# Altium PCB Simplified.PcbDoc
Units mil, origin at the board's own origin, x right, y up, seen from the top; angles counter-clockwise.
Board outline 5026.91 x 4685 mil, 2 copper layers (Top Layer, Bottom Layer); 24 components, 26 nets, 125 pads, 49 vias.
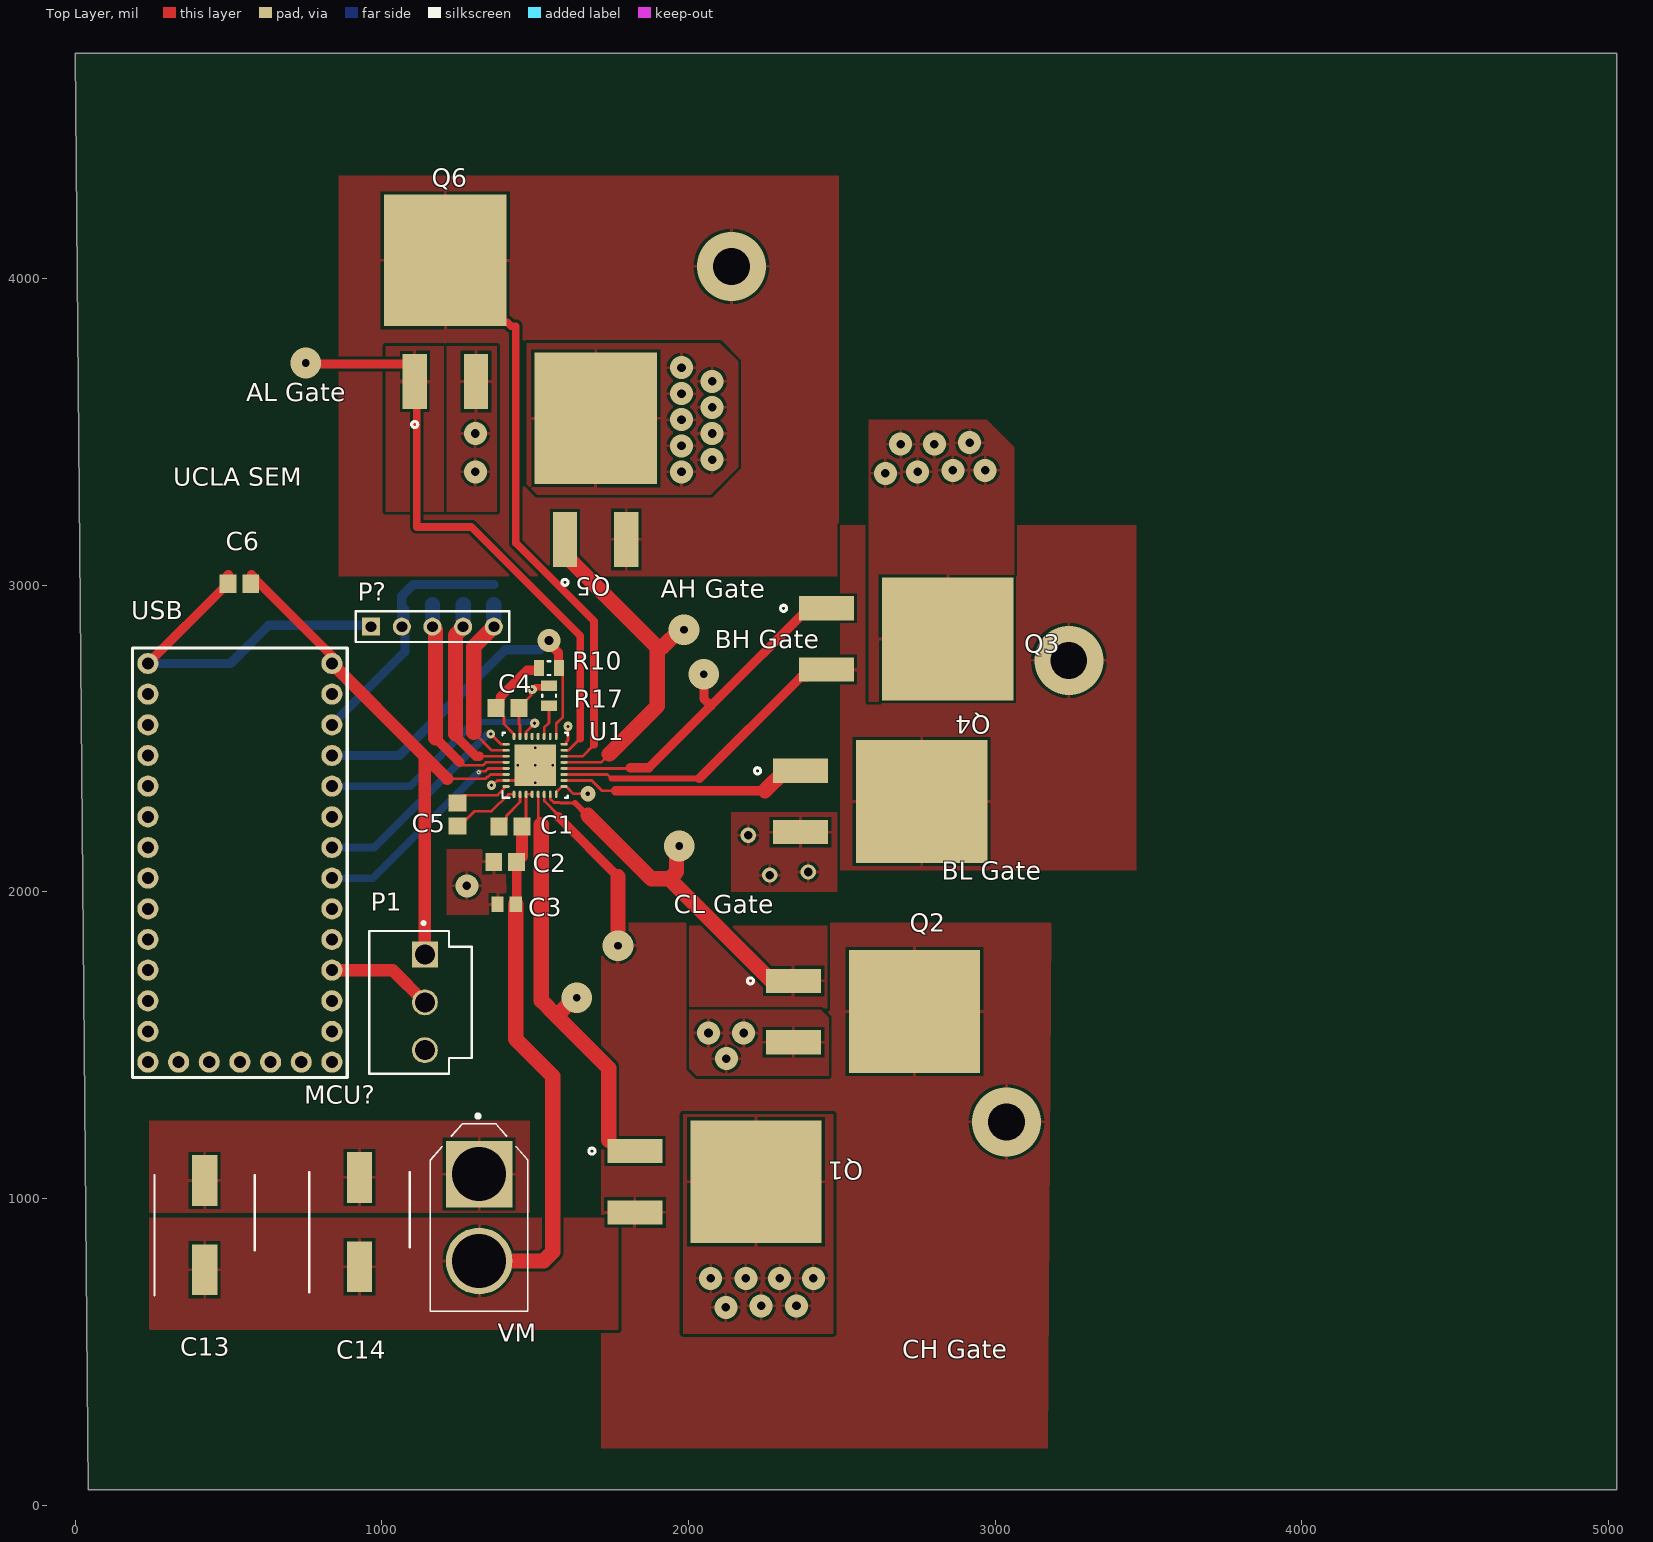
[diagram p0: Top Layer view]
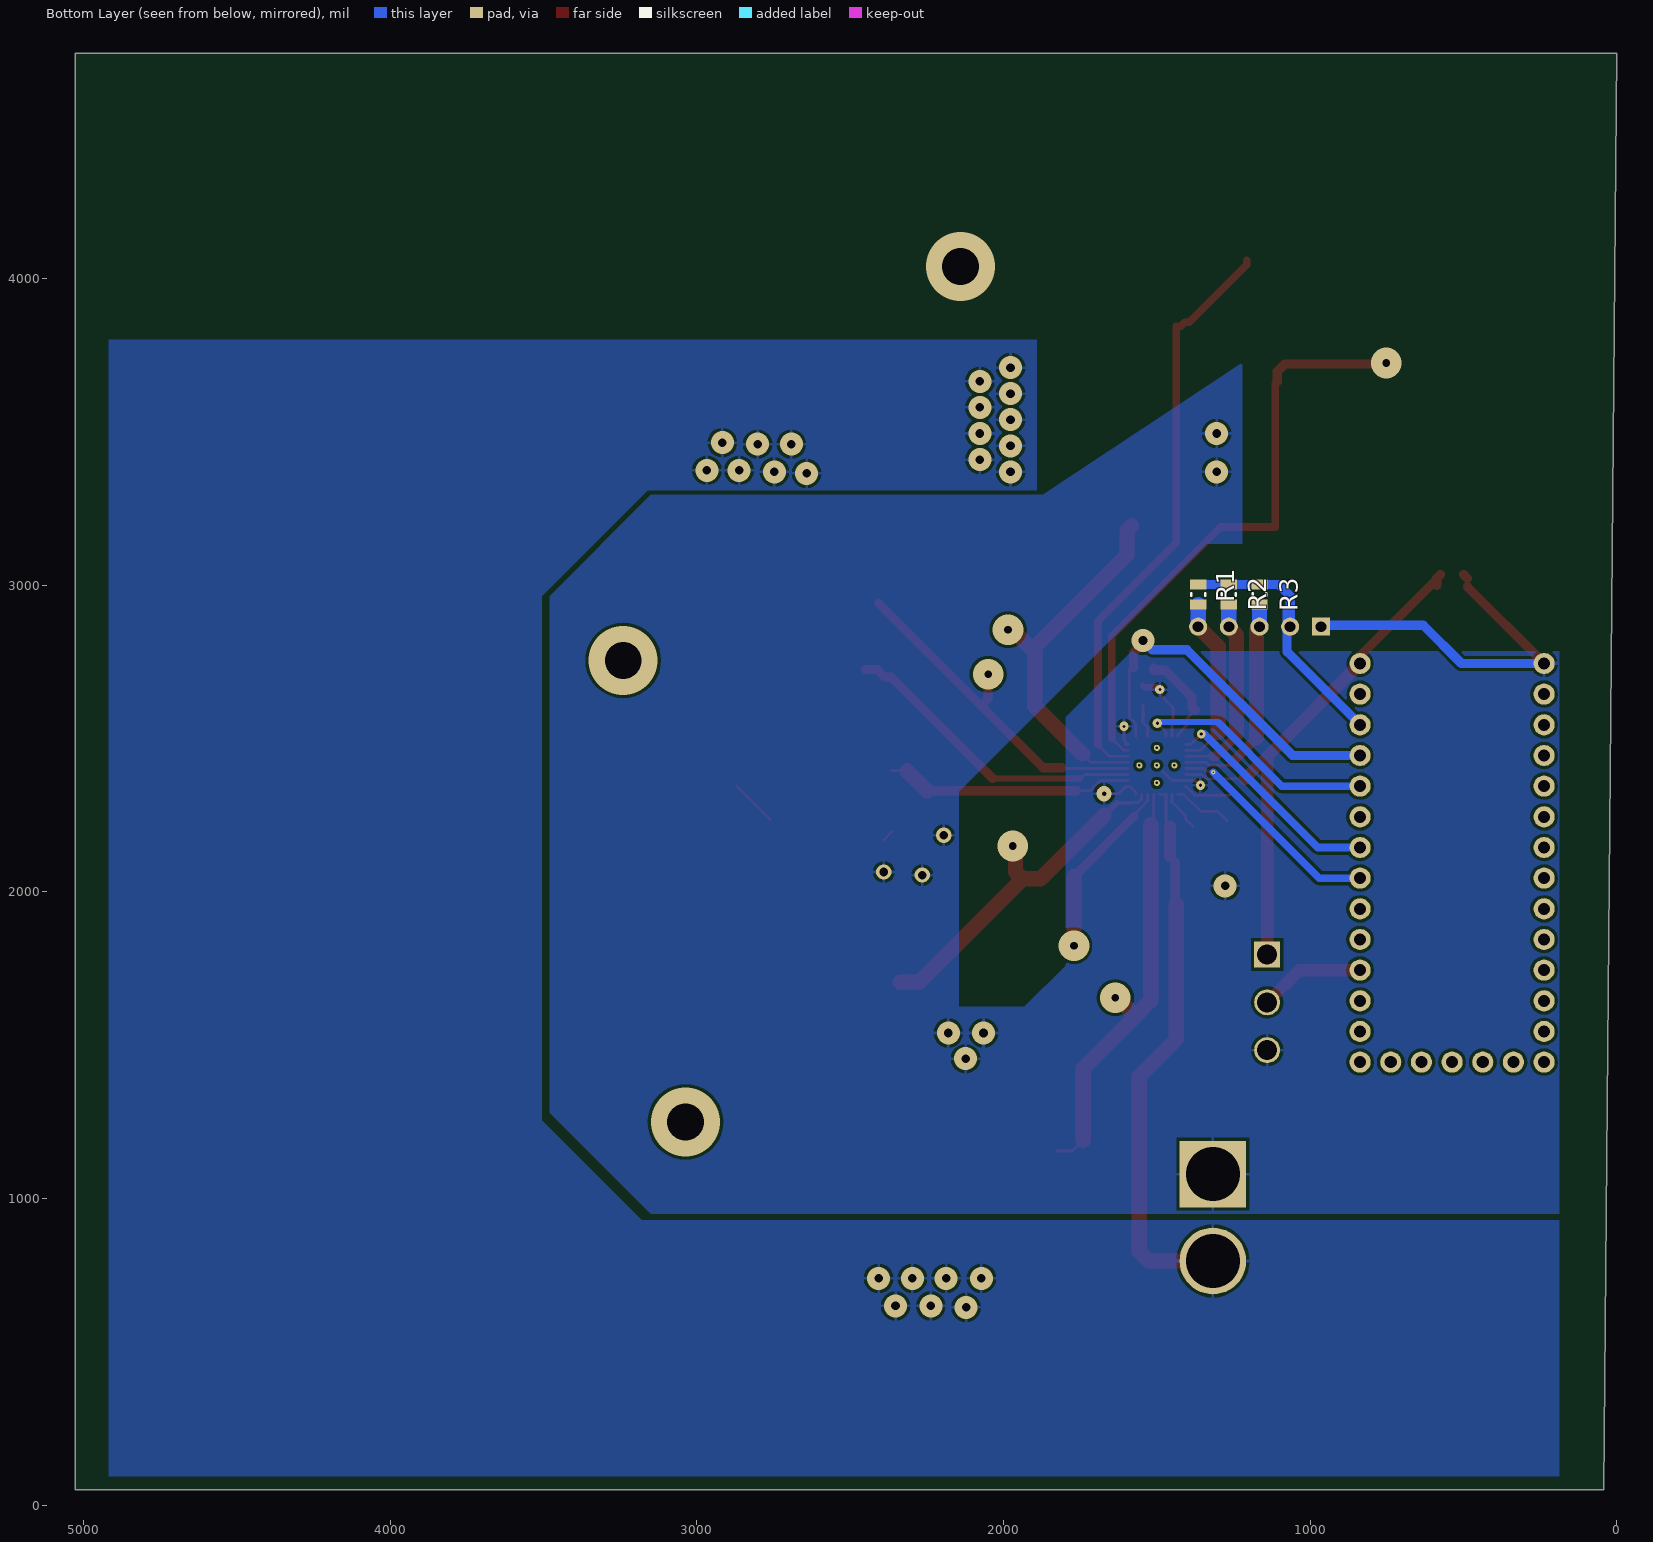
[diagram p1: Bottom Layer view, seen from below]

## Layer stack, top to bottom
Top Solder: solder mask 0.4, Solder Resist, Dk 3.5
Top Layer: signal copper 1.4
Dielectric 1: dielectric 12.6, FR-4, Dk 4.8
Bottom Layer: signal copper 1.4
Bottom Solder: solder mask 0.4, Solder Resist, Dk 3.5

## Board outline
0,4735 5026.91,4735 5026.91,1035 5026.91,50 41.91,50

## Design rules (kind name [scope] priority, off if disabled: settings)
Clearance [All] p1: gap=10 ignorepadtopadclearanceinfootprint=TRUE except(0: Arc-Hole Track-Hole SMDPad-Hole THPad-Hole Via-Hole Fill-Hole Poly-Hole Region-Hole Text-Hole)
PolygonConnect [All] p1: connectstyle=Relief reliefconductorwidth=10 reliefentries=4 polygonreliefangle="90 Angle" airgapwidth=10
RoutingVias [All] p1: holewidth=28 width=50 viastyle="Through Hole" minholewidth=28 minwidth=50 maxholewidth=28 maxwidth=50
SolderMaskExpansion [All] p1: expansion=4 istentingtop=FALSE
Width [All] p1: maxlimit=10000 minlimit=5 preferedwidth=30 bottomlayer_minwidth=10 minimp=50.000000 maximp=50.000000 favimp=50.000000
30 further rules are at their usual default settings.

## Components (designator, comment, footprint, x,y, rotation, side; value= is the part's Value field where it differs from the comment)
C1 "1uF" CAPC2013X135X45ML10T25 1419.7,2212.79 r0 top
C2 "0.1uF" CAPC2013X135X45ML10T25 1402.1,2097.79 r0 top
C3 "10uF" CAPC2013X135X50LL10T20 1406.91,1960 r0 top
C4 "1uF" CAPC2013X135X45ML10T25 1410,2600 r180 top
C5 "47nF" CAPC2013X135X45ML10T25 1246.91,2252.6 r270 top
C6 "0.1uF" CAPC2013X135X45ML10T25 535,3005 r180 top
C13 "EEE-TC1V101P" CAPAE830X1050N 421.91,913.27 r90 top
C14 "EEE-TC1V101P" CAPAE830X1050N 926.91,923.27 r90 top
MCU? "teensy3.2" teensy3.2 836.91,2745 r270 top
P1 "B3P-VH(LF)(SN)" JST-B3P-VH(LF)(SN)-3_V 1090.79,1640 r270 top
P? "Header 5" HDR1X5 965,2865 r0 top
Q1 "INFINEON" MOSFET-2 2040,1055 r180 top
Q2 "INFINEON" MOSFET-2 2556.91,1610 r180 top
Q3 "INFINEON" MOSFET-2 2665,2825 r180 top
Q4 "INFINEON" MOSFET-2 2580,2295 r180 top
Q5 "INFINEON" MOSFET-2 1696.91,3364.48 r270 top
Q6 "INFINEON" MOSFET-2 1206.91,3879.48 r270 top
R1 "CRCW08050000Z0EA" RESC2013X50X30LL20T20 1365,2970 r270 bottom
R2 "CRCW08050000Z0EA" RESC2013X50X30LL20T20 1265,2970 r270 bottom
R3 "CRCW08050000Z0EA" RESC2013X50X30LL20T20 1165,2970 r270 bottom
R10 "CRCW08050000Z0EA" RESC2013X50X30LL20T20 1545,2730 r180 top
R17 "CRCW08050000Z0EA" RESC2013X50X30LL20T20 1545,2640 r90 top
U1 "DRV8320HRTVR" RTV0032E 1499.7,2412.79 r90 top value=Value
VM "Battery" *AMASS_XT60-M 1316.91,938.27 r270 top

## Footprints (in the part's own frame and the unit in brackets; to place one, negate y for a bottom-side part, rotate by r counter-clockwise, add the part's x,y. Pads: shape width x height; smd on the part's side, far side on the other; paste and mask are expansions set on the pad)
*AMASS_XT60-M [mm]
  round 5.516 hole 4.5: 1(3.6,0)
  rect 5.516x5.516 hole 4.5: 2(-3.6,0)
  silkscreen extent -8.55,-4.05 7.75,4.05
CAPAE830X1050N [mm]
  rect 4.2x2.1 smd: 1(-3.7,0) 2(3.7,0)
  silkscreen extent -5.8,-4.15 4.15,4.15, body extent -5,-4.25 5,4.25, height 10.5
CAPC2013X135X45ML10T25 [mm] "Chip Capacitor, 2-Leads, Body 2.10x1.35mm, IPC Low Density"
  rect 1.4x1.5 smd: 1(-0.95,0) 2(0.95,0)
  body extent -1.05,-0.67 1.05,0.67, height 1.35
CAPC2013X135X50LL10T20 [mm] "Chip Capacitor, 2-Leads, Body 2.00x1.25mm, IPC High Density"
  rect 1x1.3 smd: 1(-0.75,0) 2(0.75,0)
  body extent -1.05,-0.67 1.05,0.68, height 1.35
HDR1X5 [mm] "Connector; Header; 5 Position"
  rect 1.5x1.5 hole 0.9: 1(0,0)
  round 1.5 hole 0.9: 2(2.54,0) 3(5.08,0) 4(7.62,0) 5(10.16,0)
  silkscreen extent -1.27,-1.27 11.43,1.27
JST-B3P-VH(LF)(SN)-3_V [mm] "Connector, 3-Leads, Body 8.5x11.82mm, Pitch 3.96mm"
  rect 2.15x2.15 hole 1.65: 1(-3.96,1.25)
  round 2.15 hole 1.65: 2(0,1.25) 3(3.96,1.25)
  silkscreen extent -6.68,-3.35 5.91,5.15, body extent -5.91,-3.35 5.91,5.15, height 10.9
MOSFET-2 [mil]
  rect 180x78.74 smd: 1(215,-100) 3(215,100)
  rect 428.35x400 smd: 2(-180,0)
  silkscreen extent 345,-110 365,-90
RESC2013X50X30LL20T20 [mm] "Chip Resistor, 2-Leads, Body 2.00x1.25mm, IPC High Density"
  rect 0.85x1.35 smd: 1(-0.825,0) 2(0.825,0)
  silkscreen extent -0.1,-0.58 0.1,0.58, body extent -1.1,-0.72 1.1,0.72, height 0.5
RTV0032E [mm]
  oval 0.6x0.24 smd paste+0 mask+0.051: 1(-2.4,1.75) 2(-2.4,1.25) 3(-2.4,0.75) 4(-2.4,0.25) 5(-2.4,-0.25) 6(-2.4,-0.75) 7(-2.4,-1.25) 8(-2.4,-1.75) 17(2.4,-1.75) 18(2.4,-1.25) 19(2.4,-0.75) 20(2.4,-0.25) 21(2.4,0.25) 22(2.4,0.75) 23(2.4,1.25) 24(2.4,1.75)
  oval 0.24x0.6 smd paste+0 mask+0.051: 9(-1.75,-2.4) 10(-1.25,-2.4) 11(-0.75,-2.4) 12(-0.25,-2.4) 13(0.25,-2.4) 14(0.75,-2.4) 15(1.25,-2.4) 16(1.75,-2.4) 25(1.75,2.4) 26(1.25,2.4) 27(0.75,2.4) 28(0.25,2.4) 29(-0.25,2.4) 30(-0.75,2.4) 31(-1.25,2.4) 32(-1.75,2.4)
  rect 3.45x3.45 smd paste-1.712 mask+0.051: 33(0,0)
  round 0.5 hole 0.203 mask+0.051: ""(-1.45,0) ""(0,1.45) ""(0,0) ""(0,-1.45) ""(1.45,0)
  silkscreen extent -2.7,-2.7 2.7,2.7, body extent 0,0 0.25,0.25, height 0.25
teensy3.2 [mm]
  round 1.75 hole 1: 1(0,0) 2(2.54,0) 3(5.08,0) 4(7.62,0) 5(10.16,0) 6(12.7,0) 7(15.24,0) 8(17.78,0) 9(20.32,0) 10(22.86,0) 11(25.4,0) 12(27.94,0) 13(30.48,0) 14(33.02,0) 15(33.02,-2.54) 16(33.02,-5.08) 17(33.02,-7.62) 18(33.02,-10.16) 19(33.02,-12.7) 20(33.02,-15.24) 21(30.48,-15.24) 22(27.94,-15.24) 23(25.4,-15.24) 24(22.86,-15.24) 25(20.32,-15.24) 26(17.78,-15.24) 27(15.24,-15.24) 28(12.7,-15.24) 29(10.16,-15.24) 30(7.62,-15.24) 31(5.08,-15.24) 32(2.54,-15.24) 33(0,-15.24)
  silkscreen extent -1.27,-16.51 34.29,1.27

## Part data
C1 C4 C5: library part CMP-2000-04946-1, "Multilayer Ceramic Capacitor, 1 uF, +/- 10%, 16 V, -55 to 125 degC, 0805 (2012 Metric), RoHS, Tape and Reel", Capacitance=1µF, Case Size/Dimension=0805, Dielectric=X7R, Manufacturer=Murata, Package Description="2-Pin Surface Mount Device, Body 2 x 1.25 mm", Package Reference=805, Rated Voltage=16V, Tolerance (%)=±10%, Datasheet URL=https://datasheet.ciiva.com/34302/1858922-34302874.pdf, Datasheet Version=Mar-08, Manufacturer URL=http://www.murata.com/
C2 C6: library part CMP-2100-03644-1, "Chip Capacitor, 0.1 uF, +/- 10%, 50 V, -55 to 125 degC, 0805 (2012 Metric), RoHS, Tape and Reel", Capacitance=100nF, Case Code (Imperial)=0805, Case Code (Metric)=2012, Dielectric=X7R, Dielectric Material=Ceramic, Insulation Resistance=10GR, Manufacturer=Murata, Max Operating Temperature=125degC, Min Operating Temperature=-55degC, Package Description="2-Pin Surface Mount Device, Body 2 x 1.25 mm", Package Quantity=1, Tolerance=10%, Voltage=50V, Case/Package=0805, Datasheet URL=http://psearch.en.murata.com/capacitor/product/GRM21BR71H104KA01%23.pdf, Datasheet Version=42675.0, Depth=1.25mm, Height=1.25mm, Lead Free=LeadFree, Length=2mm, Manufacturer URL=http://www.murata.com/, Material=Ceramic, Mount=SurfaceMount, Number of Pins=2, Package Reference=0805, Packaging=TapeandReel, Radiation Hardening=No, REACH SVHC=Unknown, RoHSCompliant=true, Termination=SMD/SMT, Thickness=0.053inch, Voltage Rating=50V, Voltage Rating (DC)=50V, Width=0.049inch
C3: library part CMP-2007-03453-1, Manufacturer=Murata, Part Number=GRM21BR61C106KE15L
C13 C14: "Capacitor", Manufacturer_Name=Panasonic, Mouser Part Number=667-EEE-TC1V101P, Arrow Part Number=EEE-TC1V101P, Arrow Price/Stock=https://www.arrow.com/en/products/eee-tc1v101p/panasonic, Datasheet Link=https://www.mouser.in/datasheet/2/315/ABA0000C678-951953.pdf, Height=10.5mm, Manufacturer_Part_Number=EEE-TC1V101P, Mouser Price/Stock=https://www.mouser.com/Search/Refine.aspx?Keyword=667-EEE-TC1V101P
P1: library part CMP-1755-00003-1, "Male Header, Pitch 3.96 mm, 1 x 3 Position, Height 10.9 mm, Tail Length 3.7 mm, -25 to 85 degC, RoHS, Bulk", ComponentLink1Description="Manufacturer URL", ComponentLink1URL=http://www.jst.com/home2.html, ComponentLink2Description=Datasheet, ComponentLink2URL=http://www.jst-mfg.com/product/pdf/eng/eVH.pdf, DatasheetVersion=May-16, PackageDescription="Male Header, Pitch 3.96 mm, 1 x 3 Position, Height 10.9 mm, Tail Length 3.7 mm", PackageReference=B3P-VH(LF)(SN)
P?: "Header, 5-Pin", LatestRevisionDate=17-Jul-2002, LatestRevisionNote="Re-released for DXP Platform.", Publisher="Altium Limited"
R1 R2 R3 R10 R17: library part CMP-2001-04896-1, Manufacturer="Vishay Dale", Part Number=CRCW08050000Z0EA
U1: "No Description Available", Manufacturer="Texas Instruments", Copyright="Copyright (C) 2018 Accelerated Designs. All rights reserved", PartNumber=DRV8320HRTVR, RefDes=RefDes, Type=DEV

## Via types
v1: diameter 75, hole 28, Top Layer to Bottom Layer, 30 vias
v2: diameter 100, hole 25, Top Layer to Bottom Layer, 6 vias
v3: diameter 30, hole 10, Top Layer to Bottom Layer, 4 vias
v4: diameter 50, hole 28, Top Layer to Bottom Layer, 3 vias
v5: diameter 225, hole 120, Top Layer to Bottom Layer, 3 vias
v6: diameter 28, hole 10, Top Layer to Bottom Layer, 1 vias
v7: diameter 15, hole 5, Top Layer to Bottom Layer, 1 vias
v8: diameter 50, hole 15, Top Layer to Bottom Layer, 1 vias

## Nets (pads, with @x,y where several pads share a name; then routed paths per layer and width w, separated by ;. In a path a pad name is that pad's centre, name@x,y a point inside that pad or via, vN(x,y) a via of type N, cw(c..) or ccw(c..) an arc to the next point about the centre after c; other vN are vias at no path point)
+3.3: MCU?.3 P?.2 R1.1 R2.1 R3.1 | length 889.1
  Bottom Layer w30: MCU?.3 1075,2783.09 1075,2920 ; P?.2 1065,2965 1102.48,3002.48 R3.1 R2.1 R1.1
+5: C6.1 MCU?.1 P1.1 U1.30 | length 1769.9
  Top Layer w9: 1213.1,2368.81 1336.98,2368.81 1342.98,2374.81 1345.64,2374.81 1354.09,2383.26 U1.30
  Top Layer w30: 574.32,3035 586.87,3022.44 C6.1@586.87,3000.04 ; C6.1@586.87,3020.04 MCU?.1@836.91,2770
  Top Layer w40: MCU?.1 1133.46,2448.46 1140,2441.91 ; P1.1 1140,2441.91 ; 1213.1,2368.81 1140,2441.91
GND: C2.1 C3.1 C4.1 C6.2 C13.2 C14.2 MCU?.33 P1.3 P?.1 Q2.3 Q4.3 Q6.3 R17.2 U1.8 U1.9 U1.16 U1.23 U1.31 U1.33 VM.2 | length 1760.5
  Top Layer w9: v3(1357.84,2347.95) 1359.89,2350 1362.6,2350 1376.17,2363.57 U1.31 1450.49,2363.57 U1.33@1482.49,2395.57 ; U1.23 1450.49,2543.18 1447.4,2546.27 C4.1 1447.4,2601.97 1485.98,2640.55 1485.98,2655.98 v3(1490,2660) ; U1.8 1568.6,2325.39 1587.1,2343.89 U1.9 1601.28,2343.89 1625.17,2320 v8(1671.91,2320) ; U1.16 1601.15,2481.68 1601.36,2481.89 1601.36,2488.86 1606.91,2494.41 v3(1606.91,2540) ; Q4.3 Q4.3@2390,2170
  Top Layer w20: v3(1490,2660) 1492.71,2660 1500.04,2667.34 1539.86,2667.34 R17.2
  Top Layer w30: MCU?.33 C6.2@486.95,2995.04 ; C6.2@486.95,3022.44 499.51,3035
  Bottom Layer w30: MCU?.33 506.22,2745 631.22,2870 960,2870 P?.1
  other v1: 2123.4,1456.05 2065,1540 2180,1540 1276.91,2020 1305,3370 1305,3495
  other v4: 2265,2055 2390,2065 2195,2185
NetC1_1: C1.1 U1.2 | length 133.8
  Top Layer w9: C1.1 1405.36,2235.85 1405.36,2247.86 1450.49,2292.99 U1.2
NetC4_2: C4.2 R10.2 U1.24 | length 324.6
  Top Layer w9: C4.2@1374.7,2592.79 1397.76,2569.73 1397.76,2547.41 1430.8,2514.36 U1.24
  Top Layer w30: C4.2@1374.7,2592.79 1385.16,2603.24 1385.16,2630 1387.26,2632.1 1387.26,2637.26 1472.79,2722.79 1510.79,2722.79 R10.2@1510.79,2730
NetC5_1: C5.1 U1.32 | length 155.3
  Top Layer w9: C5.1@1261.91,2315 1262.41,2315.5 1376.82,2315.5 U1.32
NetC5_2: C5.2 U1.1 | length 194.4
  Top Layer w9: C5.2@1271.91,2232.6 1302.76,2263.44 1357.72,2263.44 1412.58,2318.3 U1.1
NetM_1: Q1.3 Q2.2 U1.6 | length 593
  Top Layer w9: U1.6 1529.23,2311.09 1529.69,2310.63 1529.69,2296.06 1575,2250.75 1575,2245
  Top Layer w30: 1575,2245 1770,2050
  Top Layer w50: v2(1770,1825) 1770,2050
  other v5: 3036.91,1250
NetM_2: Q3.3 Q4.2 U1.11 | length 1187.7
  Top Layer w9: U1.11 1735.55,2383.26 1748.81,2370 ; Q3.3@2411.22,2715 Q3.3@2435,2715 ; Q4.2@2760,2235 Q4.2@2870,2345
  Top Layer w20: 1748.81,2370 2035,2370
  Top Layer w30: 2035,2370 2365.63,2700.63 2386.85,2700.63 2411.22,2725 2435,2725 Q3.3
  other v5: 3240,2755
NetM_3: Q5.3 Q6.2 U1.14 | length 1911.1
  Top Layer w9: U1.14 1654.23,2442.31 1691.91,2480
  Top Layer w25: Q6.2 1206.91,4045.31 1394.41,3857.81 1408.59,3857.81 1421.39,3845 1436.91,3845 1436.91,3138.09 1691.91,2883.09 1691.91,2480
  other v5: 2140,4040
NetMCU?_4: MCU?.4 R10.1 U1.17 | length 1196.7
  Top Layer w9: U1.17 1568.6,2549.36 1590,2570.76 R10.1@1590,2728.27
  Top Layer w30: v1(1545,2820) 1545,2810.67 1575.75,2779.93 1575.75,2731.73 R10.1
  Bottom Layer w30: MCU?.4 1056.91,2445 1401.91,2790 1515,2790 v1(1545,2820)
NetMCU?_5: MCU?.5 U1.22 | length 804
  Top Layer w9: U1.22 1470.26,2507.36 1470.26,2521.95 v3(1498.31,2550)
  Bottom Layer w20: 1296.91,2550 1300.91,2554 1494.31,2554 v3(1498.31,2550)
  Bottom Layer w25: MCU?.5 1091.91,2345 1296.91,2550
NetMCU?_7: MCU?.7 U1.25 | length 735.4
  Top Layer w9: v6(1355,2515) 1388.32,2481.68 U1.25
  Bottom Layer w25: MCU?.7 975,2145 1345,2515 v6(1355,2515)
NetMCU?_8: MCU?.8 U1.29 | length 716.6
  Top Layer w9: v7(1315.89,2390.81) 1317.51,2390.81 1320.51,2393.81 1337.77,2393.81 1346.9,2402.94 U1.29
  Bottom Layer w25: MCU?.8 970.07,2045 v7(1315.89,2390.81)
NetMCU?_11: MCU?.11 P1.2 | length 346.6
  Top Layer w40: MCU?.11 1035,1745 P1.2
NetP?_3: P?.3 R3.2 U1.28 | length 710.9
  Top Layer w9: 1254.74,2422.17 1264.1,2412.81 1329.9,2412.81 1339.72,2422.63 U1.28
  Top Layer w30: 1175,2501.91 1254.74,2422.17
  Top Layer w50: P?.3 1175,2855 1175,2501.91
  Bottom Layer w50: P?.3 R3.2
NetP?_4: P?.4 R2.2 U1.27 | length 631.5
  Top Layer w9: 1317.69,2442.31 U1.27
  Top Layer w30: 1240,2515 1240,2509.29 1306.97,2442.31 1317.69,2442.31
  Top Layer w50: 1240,2515 1240,2837.55 1265,2862.55 P?.4
  Bottom Layer w50: P?.4 R2.2
NetP?_5: P?.5 R1.2 U1.26 | length 573.9
  Top Layer w9: 1300,2520 1300,2519.7 1357.7,2462 U1.26
  Top Layer w50: 1300,2520 1300,2800 P?.5
  Bottom Layer w50: P?.5 R1.2
NetQ1_1: Q1.1 U1.5 | length 1413.3
  Top Layer w9: U1.5 1509.54,2311.09 1510,2310.63 1510,2230 1520,2220 ; Q1.1@1739.5,1189.87 1774.37,1155 Q1.1
  Top Layer w50: 1520,2220 1520,1645.2 1570.1,1595.1 ; v2(1635,1655) 1630,1655 1570.1,1595.1 ; Q1.1@1739.5,1189.87 1739.5,1425.7 1570.1,1595.1
NetQ2_1: Q2.1 U1.7 | length 1171.6
  Top Layer w9: U1.7 1549,2318.21 1549,2303.62 1560.64,2291.99 1580.01,2291.99 1582,2290 1630,2290 ; 1670,2250 1671.91,2250
  Top Layer w20: 1630,2290 1670,2250
  Top Layer w50: 1671.91,2250 1879.43,2042.48 1937.52,2042.48 ; v2(1970,2150) 1960.43,2140.43 1960.43,2065.39 1937.52,2042.48 ; Q2.1@2336.91,1705 2275,1705 1937.52,2042.48
NetQ3_1: Q3.1 U1.12 | length 1149.3
  Top Layer w9: U1.12 1807.94,2402.94 1810,2405
  Top Layer w30: 1810,2405 1870.63,2405 2072.82,2607.19 ; v2(2050,2710) 2050,2630 2072.82,2607.19 ; Q3.1@2407.82,2942.19 2072.82,2607.19
NetQ4_1: Q4.1 U1.10 | length 811.6
  Top Layer w9: U1.10 1684.2,2363.57 1717.78,2330 1761.94,2330 ; Q4.1@2314.37,2395 Q4.1
  Top Layer w30: 1761.94,2330 2249.37,2330
  Top Layer w50: 2249.37,2330 Q4.1@2314.37,2395
NetQ5_1: Q5.1 U1.13 | length 1209.2
  Top Layer w9: U1.13 1714.54,2422.63 1741.91,2450
  Top Layer w50: Q5.1@1582.54,3193.96 1596.91,3179.59 Q5.1 1596.91,3098.85 1898.46,2797.31 ; 1741.91,2450 1898.46,2606.54 1898.46,2797.31 ; v2(1985,2855) 1971.47,2855 1913.78,2797.31 1898.46,2797.31
NetQ6_1: Q6.1 U1.15 | length 1959.9
  Top Layer w9: U1.15 1594.27,2462.09 1608.86,2462.09 1646.91,2500.14
  Top Layer w25: Q6.1 1114.15,3657.25 1114.15,3190.29 1291.63,3190.29 1646.91,2835 1646.91,2500.14
  Top Layer w30: v2(751.91,3725) 755.12,3721.8 1082.54,3721.8 1106.91,3697.43 Q6.1
NetR17_1: R17.1 U1.19 | length 106.8
  Top Layer w9: U1.19 1529.23,2535.6 1545,2551.37 R17.1
VDD: C1.2 C2.2 C3.2 C13.1 C14.1 Q1.2 Q3.2 Q5.2 U1.3 U1.4 VM.1 | length 1818.9
  Top Layer w9: C2.2 C2.2@1457.1,2115.39 ; C1.2 1470.17,2225.86 U1.3 U1.4
  Top Layer w30: C3.2@1439.5,1967.98 C2.2
  Top Layer w40: C2.2@1457.1,2115.39 C1.2
  Top Layer w50: VM.1 1527.62,796.54 1556.91,825.82 1556.91,1190 1556.91,1243.27 1556.91,1400 1436.44,1520.47 C3.2
  other v1: 2121.91,645 2236.91,650 2351.91,650 2071.91,740 2186.91,740 2296.91,740 2406.91,740 2641.91,3365 1976.91,3370 2746.91,3370 2861.91,3375 2966.91,3375 2076.91,3410 1976.91,3455 2691.91,3460 2801.91,3460 2916.91,3465 2076.91,3495 1976.91,3540 2076.91,3580 1976.91,3625 2076.91,3665 1976.91,3710
pads on no net: MCU?.2 MCU?.6 MCU?.9 MCU?.10 MCU?.12 MCU?.13 MCU?.14 MCU?.15 MCU?.16 MCU?.17 MCU?.18 MCU?.19 MCU?.20 MCU?.21 MCU?.22 MCU?.23 MCU?.24 MCU?.25 MCU?.26 MCU?.27 MCU?.28 MCU?.29 MCU?.30 MCU?.31 MCU?.32 U1. U1.18 U1.20 U1.21

## Polygon pours and split planes (outlines as drawn)
NetM_3 on Top Layer "NETM_3_L01_P032" (solid, pour order 32): 860,3030 2490,3030 2490,4335 860,4335
NetM_1 on Top Layer "NETM_1_L01_P029" (solid, pour order 29): 3182.69,1900 1715,1900 1715,185 3171.59,185
GND on Top Layer "GND_L01_P033" (solid, pour order 33): 2485,2260 2140,2260 2140,2000 2485,2000
VDD on Top Layer "VDD_L01_P011" (solid, pour order 11): 2586.91,2620 3061.91,2620 3061.91,3450 2971.91,3540 2586.91,3540
NetM_2 on Top Layer "NETM_2_L01_P031" (solid, pour order 31): 3460,2070 3460,3195 2495,3195 2495,2070
NetQ2_1 on Top Layer "NETQ2_1_L01_P004" (solid, pour order 4): 2451.91,1890 2001.91,1890 2001.91,1620 2451.91,1620
GND on Top Layer "GND_L01_P000" (solid, pour order 0): 2001.91,1615 2431.91,1615 2456.91,1590 2456.91,1400 2026.91,1400 2001.91,1425
NetQ6_1 on Top Layer "NETQ6_1_L01_P014" (solid, pour order 14): 1011.91,3780 1011.91,3240 1201.91,3240 1201.91,3780
GND on Top Layer "GND_L01_P008" (solid, pour order 8): 1211.91,3240 1211.91,3780 1375,3780 1375,3240
GND on Top Layer "GND_L01_P017" (solid, pour order 17): 1481.91,1253.27 241.91,1253.27 241.91,953.27 1481.91,953.27
VDD on Top Layer "VDD_L01_P016" (solid, pour order 16): 1771.24,936.69 241.24,936.69 241.24,576.69 236.24,571.69 1771.24,571.69
GND on Top Layer "GND_L01_P015" (solid, pour order 15): 1401.91,2140 1211.91,2140 1211.91,1925 1406.91,1925
VDD on Top Layer "VDD_L01_P012" (solid, pour order 12): 1471.91,3790 1471.91,3330 1506.91,3295 2071.91,3295 2161.91,3385 2161.91,3730 2101.91,3790
VDD on Top Layer "VDD_L01_P010" (solid, pour order 10): 1981.91,1275 1981.91,560 2471.91,560 2471.91,1275
GND on Bottom Layer "Bottom Layer-GND" (solid, pour order 28): 186.91,950 3150,950 3480,1280 3480,2965 3150,3295 1871.86,3295 1221.91,3725.04 1221.91,3135 1336.91,3135 2145,2326.91 2145,1625 1931.91,1625 1796.91,1760 1796.91,2570 1581.91,2785 186.91,2785
VDD on Bottom Layer "Bottom Layer-VDD" (solid, pour order 27): 186.91,95 4916.91,95 4916.91,3800 1891.91,3800 1891.91,3310 3160,3310 3505,2965 3505,1255 3180,930 186.91,930
no net on Bottom Layer "NONET_L02_P022" (solid, pour order 22): 4935,1260

## Silkscreen, mask and mechanical layers (free items; w line width, h text height)
Top Overlay:
  text "AL Gate" at 556.91,3600 h60
  text "UCLA SEM" at 320,3325 h60
  text "AH Gate" at 1910,2960 h60
  text "BH Gate" at 2085,2795 h60
  text "BL Gate" at 2825,2040 h60
  text "CL Gate" at 1951.91,1930 h60
  text "CH Gate" at 2696.91,480 h60
Mechanical 1:
  drawing of 2186 lines, arcs and shapes, not listed

## Text inside footprints (layer, text, board x,y; h text height)
MCU?: Top Overlay "USB" at 181.91,2890 h60